# Altium PCB Capstone PCB.PcbDoc
Units mil, origin at the board's own origin, x right, y up, seen from the top; angles counter-clockwise.
Board outline 2600 x 4000 mil, 4 copper layers (Top Signal, Ground, Power, Bottom Signal), stack 62.45 mil thick; 105 components, 95 nets, 299 pads, 0 vias.
Unrouted connection lines stored in the file: 140.
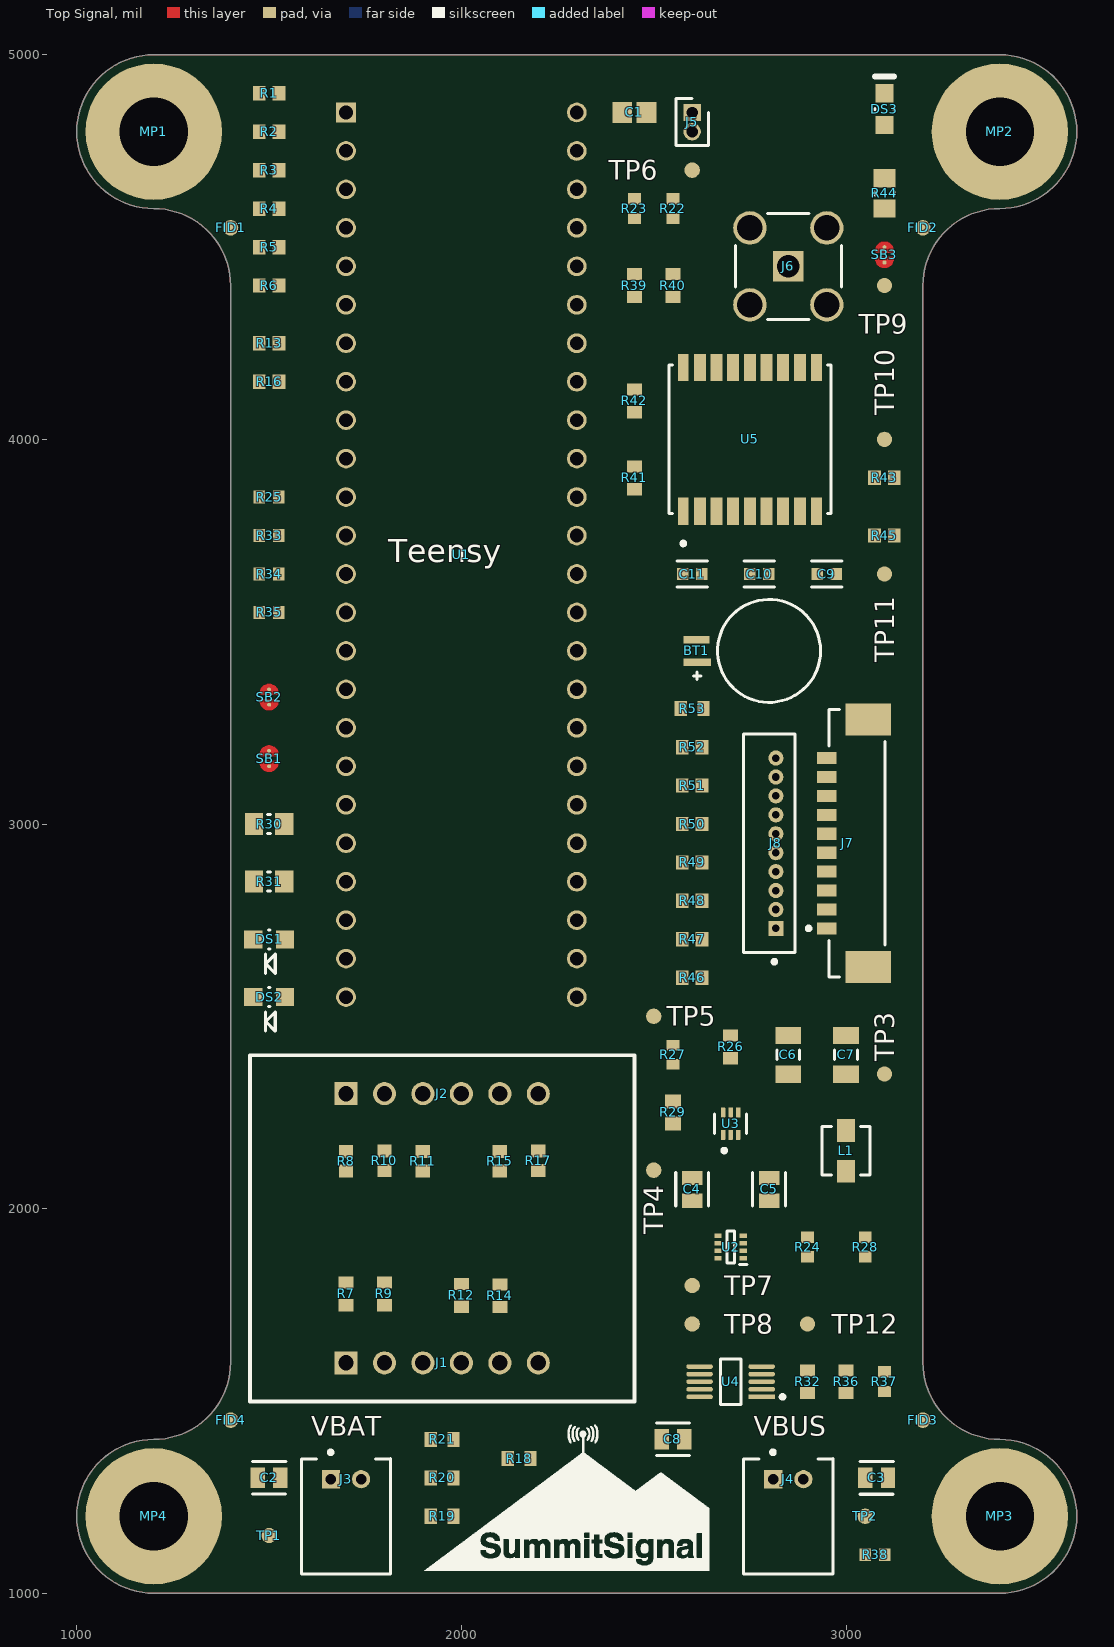
[diagram p0: Top Signal view]
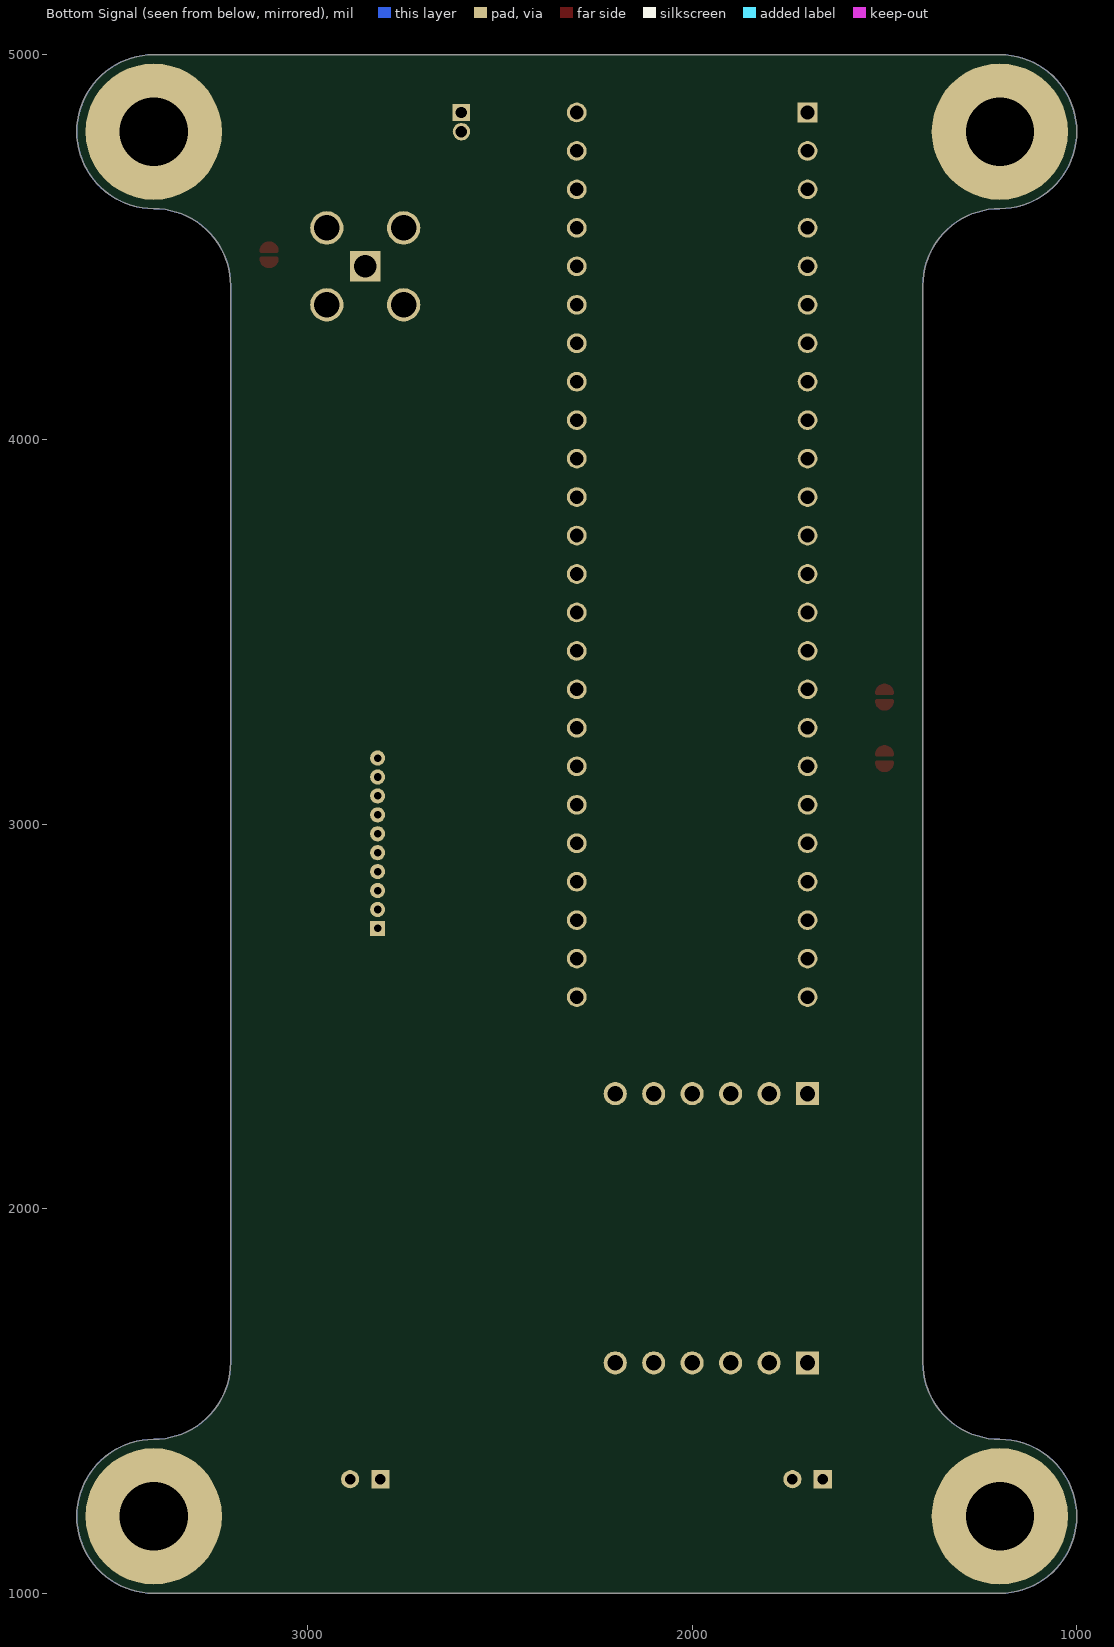
[diagram p1: Bottom Signal view, seen from below]
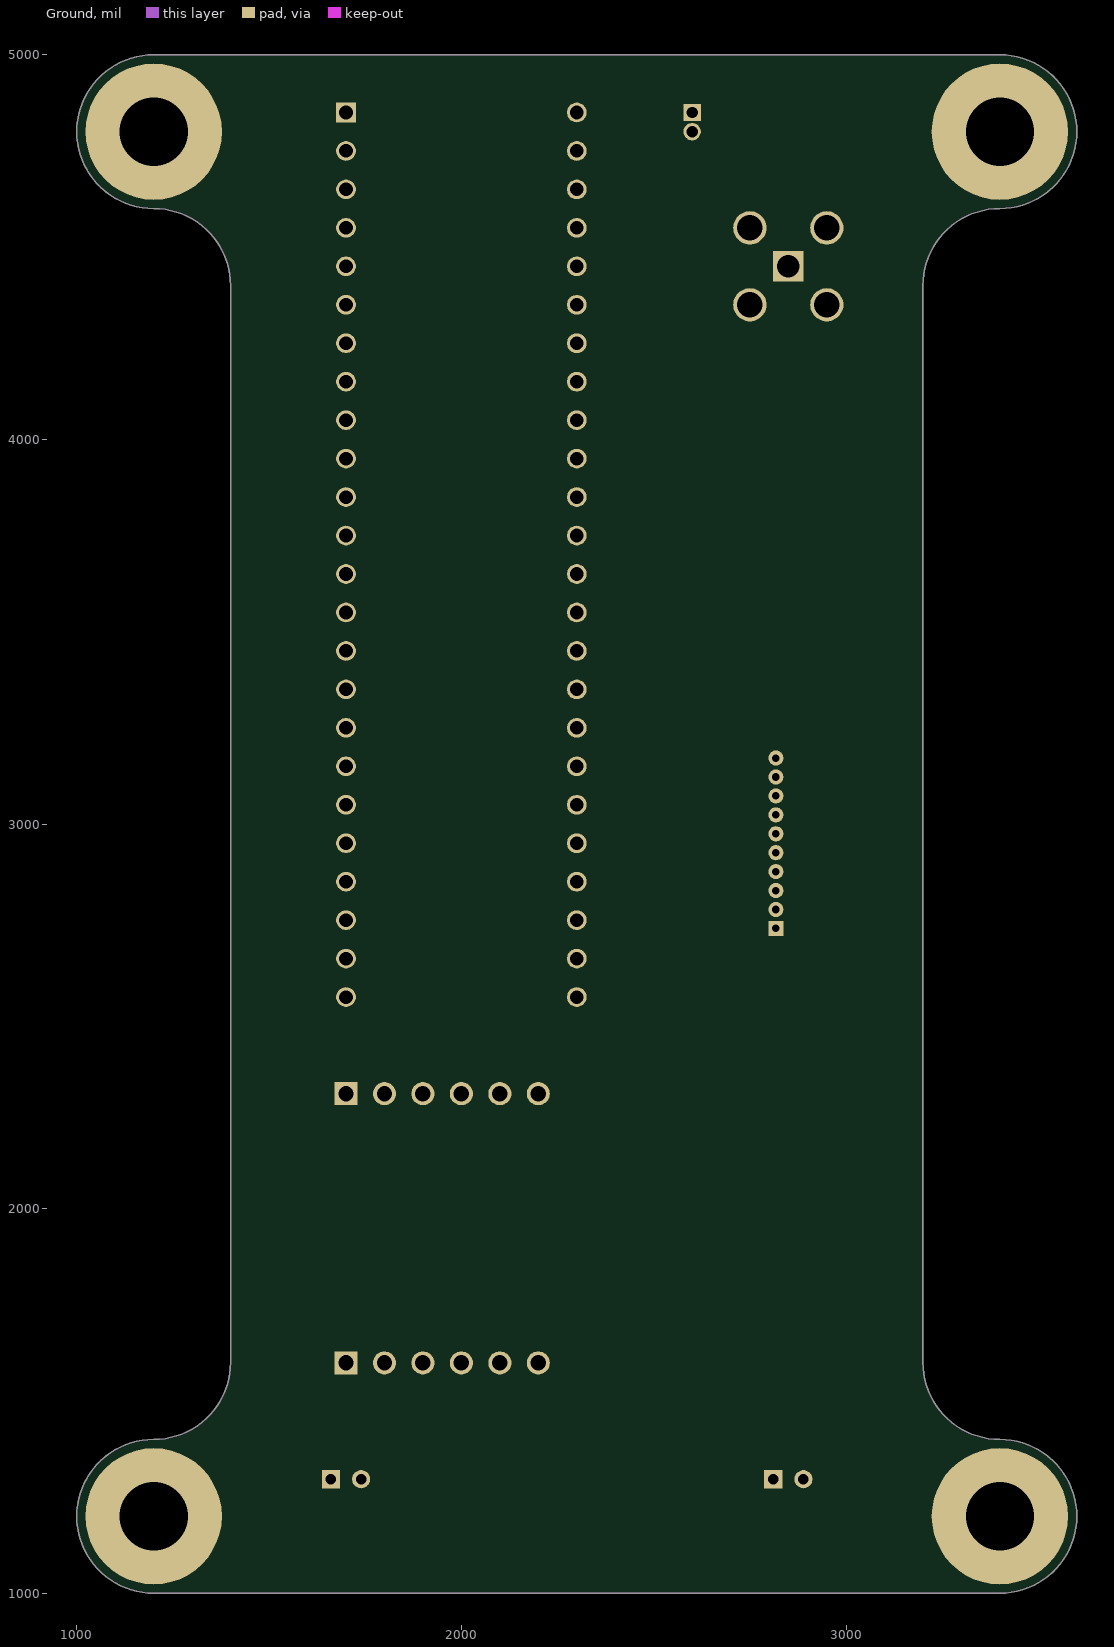
[diagram p2: Ground]
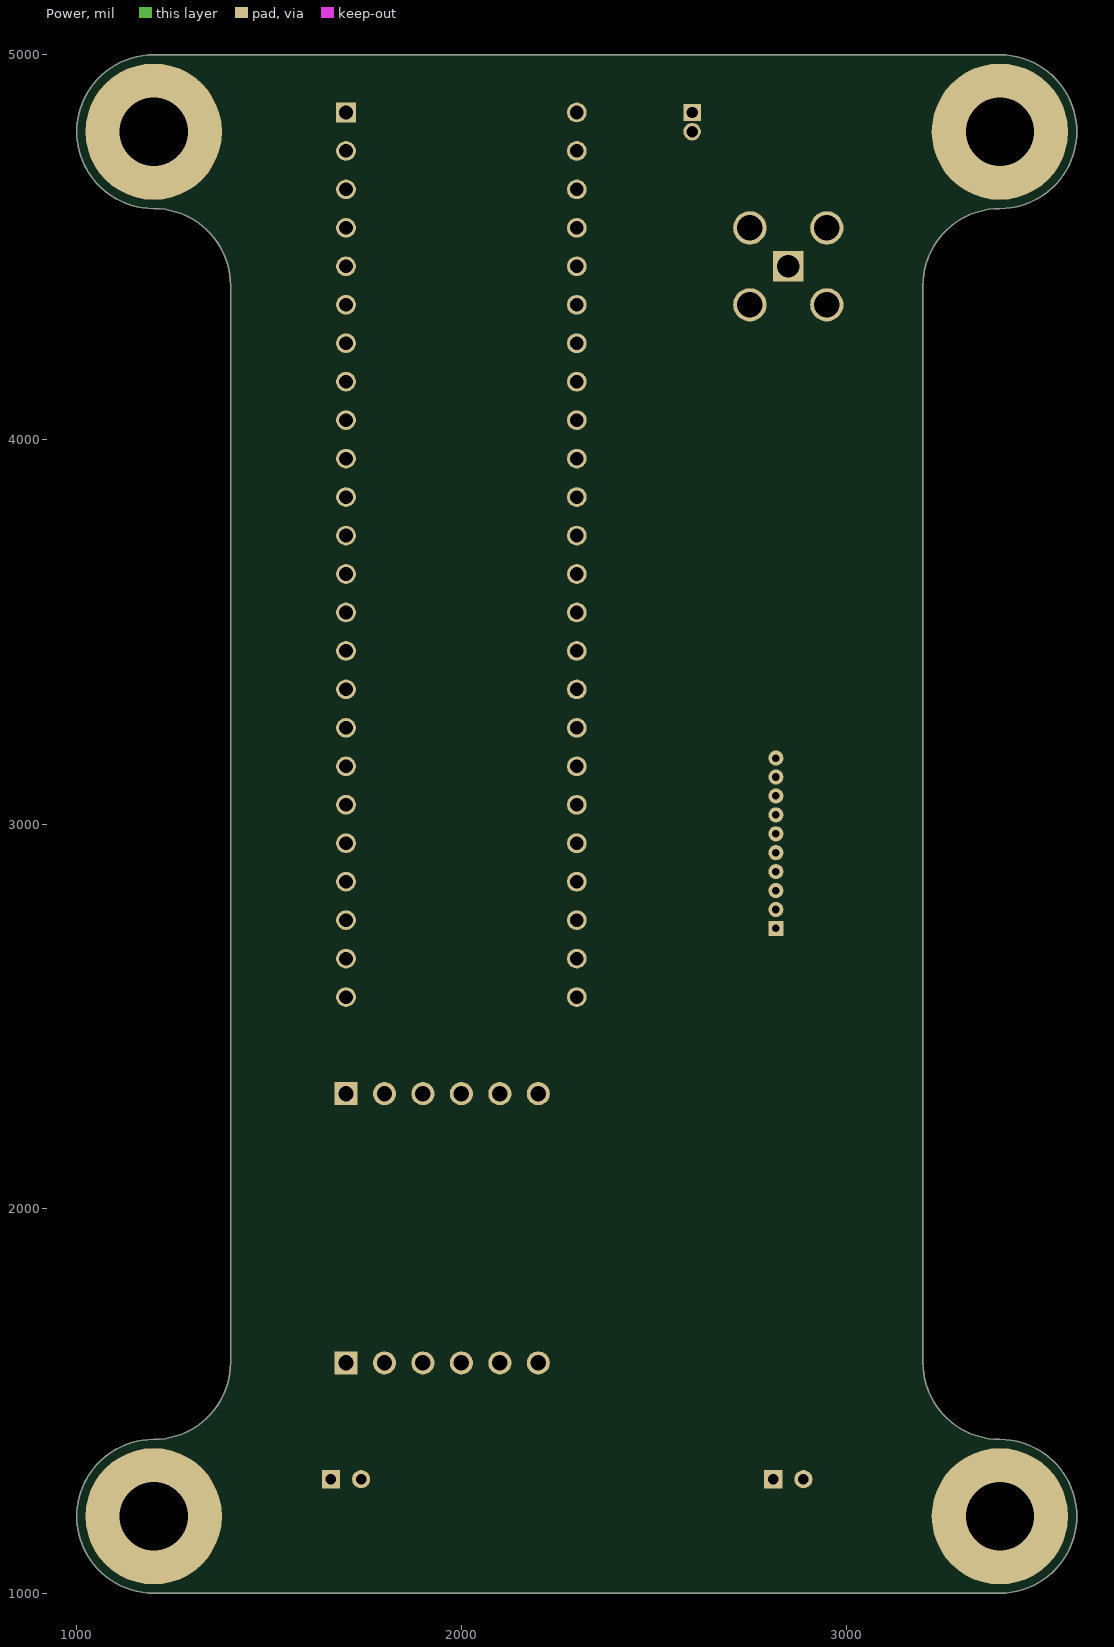
[diagram p3: Power]

## Layer stack, top to bottom
Top Solder: solder mask 1.2, Solder Resist, Dk 3.8
Top Signal: signal copper 1.38
Dielectric 2: prepreg 8.28, PP-006, Dk 4.4
Ground: signal copper 0.6
Dielectric 1: core 41.93, FR-4, Dk 4.6
Power: signal copper 0.6
Dielectric 3: prepreg 8.28, PP-006, Dk 4.4
Bottom Signal: signal copper 1.38
Bottom Solder: solder mask 1.2, Solder Resist, Dk 3.8

## Board outline
1200,1000 cw(c1200,1200) 1000,1200 cw(c1200,1200) 1200,1400 ccw(c1200,1600) 1400,1600 1400,4400 ccw(c1200,4400) 1200,4600 cw(c1200,4800) 1000,4800 cw(c1200,4800) 1200,5000 3400,5000 cw(c3400,4800) 3600,4800 cw(c3400,4800) 3400,4600 ccw(c3400,4400) 3200,4400 3200,1600 ccw(c3400,1600) 3400,1400 cw(c3400,1200) 3600,1200 cw(c3400,1200) 3400,1000

## Design rules (kind name [scope] priority, off if disabled: settings)
BoardOutlineClearance [All] p1: gap=10 ignorepadtopadclearanceinfootprint=FALSE except(0: Arc-SplitContinuation Track-SplitContinuation SMDPad-SplitContinuation THPad-SplitContinuation Via-SplitContinuation Fill-SplitContinuation Poly-SplitContinuation Region-SplitContinuation Text-SplitContinuation; 11.81: Arc-OutlineEdge Track-OutlineEdge SMDPad-OutlineEdge THPad-OutlineEdge Via-OutlineEdge Fill-OutlineEdge Poly-OutlineEdge Region-OutlineEdge Text-OutlineEdge)
Clearance [All] p1: gap=10 ignorepadtopadclearanceinfootprint=FALSE except(0: Arc-Hole Track-Hole SMDPad-Hole THPad-Hole Via-Hole Fill-Hole Poly-Hole Region-Hole Text-Hole; 3.54: Arc-Arc Arc-Track Track-Track; 5: SMDPad-SMDPad; 7.87: Arc-SMDPad Track-SMDPad)
HoleSize [All] p1: absolutevalues=TRUE maxlimit=100 minlimit=11.81 maxpercent=80.000 minpercent=20.000
MinimumAnnularRing [All] p1: minimumring=11.81
MinimumSolderMaskSliver [All] p1: minsoldermaskwidth=7.87
PolygonConnect [All] p1: connectstyle=Direct reliefconductorwidth=10 reliefentries=4 polygonreliefangle="90 Angle" airgapwidth=10
RoutingVias [All] p1: holewidth=11.81 width=35.43 viastyle="Through Hole" minholewidth=11.81 minwidth=35.43 maxholewidth=28 maxwidth=50
SolderMaskExpansion [All] p1: expansion=4 istentingtop=FALSE
Width GNSS [InNetClass('GNSS')] p1: maxlimit=13.48 minlimit=7.12 preferedwidth=13.48 toplayer_minwidth=13.48 midlayer1_maxwidth=7.12 midlayer1_prefwidth=7.12 midlayer2_maxwidth=7.12 midlayer2_prefwidth=7.12 bottomlayer_minwidth=13.48 impedanceprofiledriven=TRUE impedanceprofileid={8B519938-629A-44D7-94C1-89ACB021334B} impedanceprofilevalue=50.000000 minimp=50.000000 maximp=50.000000 favimp=50.000000
Width [All] p2: maxlimit=10 minlimit=3.54 preferedwidth=10
28 further rules are at their usual default settings.

## Classes and differential pairs
net class GNSS: RF_IN
component class "Teensy and ICs": C1 FID1 FID2 FID3 FID4 J1 J2 MP1 MP2 MP3 MP4 R1 R2 R3 R4 R5 R6 R7 R8 R9 R10 R11 R12 R13 R14 R15 R16 R17 R18 R19 R20 R21 U1
component class "Power Management": C2 C3 C4 C5 C6 C7 C8 DS1 DS2 J3 J4 J5 L1 R22 R23 R24 R25 R26 R27 R28 R29 R30 R31 R32 R33 R34 R35 R36 R37 R38 SB1 SB2 TP1 TP2 TP3 TP4 TP5 TP6 TP7 TP8 TP12 U2 U3 U4
component class Communication: BT1 C9 C10 C11 DS3 J6 J7 J8 R39 R40 R41 R42 R43 R44 R45 R46 R47 R48 R49 R50 R51 R52 R53 SB3 TP9 TP10 TP11 U5

## Components (designator, comment, footprint, x,y, rotation, side; value= is the part's Value field where it differs from the comment)
BT1 "MS621FE-FL11E" SEIK-MS621FE-FL11E-2_V 2800,3450 r180 top
C1 "GCM21BR71C155KA37L" "0805 Ceramic Capacitor" 2450,4850 r180 top
C2 "C0805C106K8PACTU" FP-C0805C-DG-MFG 1500,1300 r180 top value=10uF
C3 "C0805C106K8PACTU" FP-C0805C-DG-MFG 3079.53,1300 r0 top value=10uF
C4 "C0805C106K8PACTU" FP-C0805C-DG-MFG 2600,2050 r270 top value=10uF
C5 "C0805C106K8PACTU" FP-C0805C-DG-MFG 2800,2050 r270 top value=10uF
C6 "GRM31CR71C106KAC7L" CAPC3216X180X55LL20T25 2850,2400 r270 top
C7 "GRM31CR71C106KAC7L" CAPC3216X180X55LL20T25 3000,2400 r270 top
C8 "C0805C106K8PACTU" FP-C0805C-DG-MFG 2550,1400 r180 top value=10uF
C9 "CL10B105KP8NNNC" FP-CL10-IPC_C 2950,3650 r0 top
C10 "CL10B104MB8NNNC" FP-CL10-IPC_C 2774.68,3650 r180 top
C11 "CL10B105KP8NNNC" FP-CL10-IPC_C 2600,3650 r0 top
DS1 "SML-LXT0805GW-TR" LUMX-SML-LXT0805_V 1500,2700 r180 top
DS2 "SML-LXT0805GW-TR" LUMX-SML-LXT0805_V 1500,2550 r180 top
DS3 "LTST-C170KRKT" LTST-C170KRKT_V 3100,4858.66 r90 top
FID1 "Fiducial" "40 mil Circular Test Point" 1400,4550 r90 top
FID2 "Fiducial" "40 mil Circular Test Point" 3200,4550 r90 top
FID3 "Fiducial" "40 mil Circular Test Point" 3200,1450 r90 top
FID4 "Fiducial" "40 mil Circular Test Point" 1400,1450 r90 top
J1 "0022284067" 0022284067-Footprint-1 2200,1598.82 r90 top
J2 "0022284067" 0022284067-Footprint-1 2200,2298.82 r90 top
J3 "S2B-PH-K-S(LF)(SN)" JST-S2B-PH-K-S_V 1700,1200 r0 top
J4 "S2B-PH-K-S(LF)(SN)" JST-S2B-PH-K-S_V 2850,1200 r0 top
J5 "GRPB021VWVN-RC" HDRV2W40P0X127_1X2_254X214X400P 2600,4850 r270 top
J6 "901-143-6RFX" AMPH-901-143-6RFX_V 2850,4450 r90 top
J7 "53398-1071" MOLX-53398-1071_V 3018.9,2950 r270 top
J8 "53047-1010" FP-53047-1010-MFG 2800,2950 r270 top
L1 "IHLP1212AEERR47M11" FP-IHLP-1212AE-11-MFG 3000,2150 r90 top
MP1 "M4 Screw Hole" "New footprint 1" 1200,4800 r0 top
MP2 "M4 Screw Hole" "New footprint 1" 3400,4800 r0 top
MP3 "M4 Screw Hole" "New footprint 1" 3400,1200 r0 top
MP4 "M4 Screw Hole" "New footprint 1" 1200,1200 r0 top
R1 "ERJ-3GEYJ472V" "0603 Resistor" 1500,4900 r0 top
R2 "ERJ-3GEYJ472V" "0603 Resistor" 1500,4800 r0 top
R3 "ERJ-3GEYJ472V" "0603 Resistor" 1500,4700 r0 top
R4 "ERJ-3GEYJ472V" "0603 Resistor" 1500,4600 r0 top
R5 "ERJ-3GEYJ472V" "0603 Resistor" 1500,4500 r0 top
R6 "ERJ-3GEYJ472V" "0603 Resistor" 1500,4400 r0 top
R7 "RC0603JR-070RL" RESC1608X55X25ML10T15 1700,1778.35 r270 top
R8 "CRGCQ0603J33R" "0603 Resistor" 1700,2123.23 r270 top
R9 "RC0603JR-070RL" RESC1608X55X25ML10T15 1800,1778.35 r270 top
R10 "CRGCQ0603J33R" "0603 Resistor" 1800,2124.41 r90 top
R11 "CRGCQ0603J33R" "0603 Resistor" 1900,2123.23 r90 top
R12 "RC0603JR-070RL" RESC1608X55X25ML10T15 2000,1774.41 r90 top
R13 "CRGCQ0603J33R" "0603 Resistor" 1500,4250 r180 top
R14 "RC0603JR-070RL" RESC1608X55X25ML10T15 2100,1773.23 r90 top
R15 "CRGCQ0603J33R" "0603 Resistor" 2100,2123.23 r270 top
R16 "CRGCQ0603J33R" "0603 Resistor" 1500,4150 r180 top
R17 "CRGCQ0603J33R" "0603 Resistor" 2200,2124.41 r270 top
R18 "RC0603JR-070RL" RESC1608X55X25ML10T15 2150,1350 r0 top
R19 "RC0603JR-070RL" RESC1608X55X25ML10T15 1950,1200 r0 top
R20 "RC0603JR-070RL" RESC1608X55X25ML10T15 1950,1300 r0 top
R21 "RC0603JR-070RL" RESC1608X55X25ML10T15 1950,1400 r0 top
R22 "ERJ3EKF1002V" RESC1609X55X30LL15T15 2550,4600 r90 top
R23 "ERJ3EKF1002V" RESC1609X55X30LL15T15 2450,4600 r90 top
R24 "ERJ3EKF1002V" RESC1609X55X30LL15T15 2900,1900 r270 top
R25 "ERJ3EKF1002V" RESC1609X55X30LL15T15 1500,3850 r0 top
R26 "RC0603JR-070RL" RESC1608X55X25ML10T15 2700,2420.47 r270 top
R27 "ERJ-3EKF5232V" RESC1608X55X30LL15T15 2550,2400 r90 top value=732k
R28 "ERJ3EKF1002V" RESC1609X55X30LL15T15 3050,1900 r270 top
R29 "ERJ-3EKF1003V" RESC1608X55X30ML15T15 2550,2250 r90 top value=100k
R30 "RC0805JR-07200RL" RESC2013X60X35ML10T20 1500,3000 r180 top value=200
R31 "RC0805JR-07200RL" RESC2013X60X35ML10T20 1500,2850 r180 top value=200
R32 "RC0603JR-070RL" RESC1608X55X25ML10T15 2900,1550 r90 top
R33 "ERJ3EKF1002V" RESC1609X55X30LL15T15 1500,3750 r180 top
R34 "ERJ3EKF1002V" RESC1609X55X30LL15T15 1500,3650 r180 top
R35 "ERJ3EKF1002V" RESC1609X55X30LL15T15 1500,3550 r180 top
R36 "RC0603JR-070RL" RESC1608X55X25ML10T15 3000,1550 r90 top
R37 "ERJ3EKF1002V" RESC1609X55X30LL15T15 3100,1550 r270 top
R38 "ERJ3EKF1002V" RESC1609X55X30LL15T15 3075.59,1100 r180 top
R39 "RC0603JR-070RL" RESC1608X55X25ML10T15 2450,4400 r270 top
R40 "RC0603JR-070RL" RESC1608X55X25ML10T15 2550,4400 r270 top
R41 "RC0603JR-070RL" RESC1608X55X25ML10T15 2450,3900 r90 top
R42 "RC0603JR-070RL" RESC1608X55X25ML10T15 2450,4100 r90 top
R43 "CRGCQ0603J33R" "0603 Resistor" 3100,3900 r180 top
R44 "RC0805FR-07374RL" RESC2013X60X35ML10T20 3100,4639.37 r90 top value=374
R45 "CRGCQ0603J33R" "0603 Resistor" 3100,3750 r180 top
R46 "CRGCQ0603J33R" "0603 Resistor" 2600,2600 r180 top
R47 "CRGCQ0603J33R" "0603 Resistor" 2600,2700 r180 top
R48 "CRGCQ0603J33R" "0603 Resistor" 2600,2800 r180 top
R49 "CRGCQ0603J33R" "0603 Resistor" 2600,2900 r180 top
R50 "CRGCQ0603J33R" "0603 Resistor" 2600,3000 r180 top
R51 "CRGCQ0603J33R" "0603 Resistor" 2600,3100 r180 top
R52 "CRGCQ0603J33R" "0603 Resistor" 2600,3200 r0 top
R53 "RC0603JR-070RL" RESC1608X55X25ML10T15 2600,3300 r0 top
SB1 "SolderBridgeOpen" SOLDERBRIDGEOPEN 1500,3170 r90 top
SB2 "SolderBridgeOpen" SOLDERBRIDGEOPEN 1500,3330 r90 top
SB3 "SolderBridgeOpen" SOLDERBRIDGEOPEN 3100,4480 r90 top
TP1 "0.040\" Circular Test Point" "40 mil Circular Test Point" 1500,1150 r90 top
TP2 "0.040\" Circular Test Point" "40 mil Circular Test Point" 3050,1200 r90 top
TP3 "0.040\" Circular Test Point" "40 mil Circular Test Point" 3100,2350 r90 top
TP4 "0.040\" Circular Test Point" "40 mil Circular Test Point" 2500,2100 r90 top
TP5 "0.040\" Circular Test Point" "40 mil Circular Test Point" 2500,2500 r90 top
TP6 "0.040\" Circular Test Point" "40 mil Circular Test Point" 2600,4700 r90 top
TP7 "0.040\" Circular Test Point" "40 mil Circular Test Point" 2600,1800 r90 top
TP8 "0.040\" Circular Test Point" "40 mil Circular Test Point" 2600,1700 r90 top
TP9 "0.040\" Circular Test Point" "40 mil Circular Test Point" 3100,4400 r90 top
TP10 "0.040\" Circular Test Point" "40 mil Circular Test Point" 3100,4000 r90 top
TP11 "0.040\" Circular Test Point" "40 mil Circular Test Point" 3100,3650 r90 top
TP12 "0.040\" Circular Test Point" "40 mil Circular Test Point" 2900,1700 r90 top
U1 "Teensy 4.1" Teensy_4.1 2000,3700 r270 top
U2 "TPS2116DRLR" SOTFL50P160X60-8N 2700,1900 r180 top
U3 "TPS61023DRLT" FP-DRL0006A-MFG 2700,2220.87 r90 top
U4 "MCP73833T-AMI/UN" FP-C04-021-IPC_B 2700,1550 r180 top
U5 "MAX-M10S-00B" FP-MAX-M10S-00B-MFG 2750,4000 r90 top

## Footprints (in the part's own frame and the unit in brackets; to place one, negate y for a bottom-side part, rotate by r counter-clockwise, add the part's x,y. Pads: shape width x height; smd on the part's side, far side on the other; paste and mask are expansions set on the pad)
"40 mil Circular Test Point" [mil]
  round 40 smd: 1(0,0)
"0603 Resistor" [mm] "0603 Resistor"
  rect 0.85x0.95 smd: 1(-0.65,0) 2(0.65,0)
  body extent -0.8,-0.4 0.8,0.4, height 0.45
"0805 Ceramic Capacitor" [mm] "0805 Ceramic Capacitor"
  rect 1.3x1.4 smd: 1(-0.8,0) 2(0.8,0)
  body extent -1,-0.64 1,0.64, height 1.27
0022284067-Footprint-1 [mil]
  rect 60x60 hole 40 mask+0: 1(0,500)
  round 60 hole 40 mask+0: 2(0,400) 3(0,300) 4(0,200) 5(0,100) 6(0,0)
AMPH-901-143-6RFX_V [mm] "THD, 5-Leads, Body 7x7mm, Pitch 2.54mm"
  rect 2x2 hole 1.5: 1(0,0)
  round 2.2 hole 1.7: 2(-2.54,2.54) 3(-2.54,-2.54) 4(2.54,-2.54) 5(2.54,2.54)
  silkscreen extent -3.5,-3.5 3.5,3.5, body extent -3.5,-3.5 11.6,3.5, height 9.85
CAPC3216X180X55LL20T25 [mm] "Chip Capacitor, 2-Leads, Body 3.4x1.8mm, IPC High Density"
  rect 1.15x1.7 smd: 1(-1.275,0) 2(1.275,0)
  silkscreen extent -0.3,-0.75 0.3,0.75, body extent -1.7,-0.9 1.7,0.9, height 1.8
FP-53047-1010-MFG [mm]
  rect 1x1 hole 0.5 paste-1000 mask+0: 1(5.625,0.45)
  round 1 hole 0.5 paste-1000 mask+0: 2(4.375,0.45) 3(3.125,0.45) 4(1.875,0.45) 5(0.625,0.45) 6(-0.625,0.45) 7(-1.875,0.45) 8(-3.125,0.45) 9(-4.375,0.45) 10(-5.625,0.45)
  silkscreen extent -7.22,-1.7 7.95,1.7, body extent -7.32,-1.8 7.32,1.8, height 0.25
FP-C04-021-IPC_B [mm]
  rect 1.754x0.303 smd paste+0 mask+0: 1(-2.05,1)
  rrect100% 1.754x0.303 smd paste+0 mask+0: 2(-2.05,0.5) 3(-2.05,0) 4(-2.05,-0.5) 5(-2.05,-1) 6(2.05,-1) 7(2.05,-0.5) 8(2.05,0) 9(2.05,0.5) 10(2.05,1)
  silkscreen extent -3.55,-1.5 0.67,1.5
FP-C0805C-DG-MFG [mm]
  rect 0.95x1.35 smd paste+0 mask+0: 1(-0.75,0) 2(0.75,0)
  silkscreen extent -1.11,-1.08 1.1,1.07, body extent -1.4,-0.85 1.4,0.85, height 0.25
FP-CL10-IPC_C [mil]
  rect 29.85x31.97 smd paste+0 mask+0: 1(-24.68,0) 2(24.68,0)
  silkscreen extent -40,-33 40,33, body extent -44,-22 44,22, height 10
FP-DRL0006A-MFG [mm]
  rrect33% 0.67x0.3 smd paste+0 mask+0: 1(-0.74,0.5) 2(-0.74,0) 3(-0.74,-0.5) 4(0.74,-0.5) 5(0.74,0) 6(0.74,0.5)
  silkscreen extent -1.9,-1.05 0.65,1.05, body extent -1.17,-1.1 1.17,1.1, height 0.25
FP-IHLP-1212AE-11-MFG [mm]
  rect 1.5x1.2 smd paste+0 mask+0: 1(-1.35,0) 2(1.35,0)
  silkscreen extent -1.6,-1.6 1.6,1.6, body extent -2.2,-1.7 2.2,1.7, height 0.25
FP-MAX-M10S-00B-MFG [mm]
  rect 1.8x0.7 smd paste-1000 mask+0: 1(-4.75,4.4) 9(-4.75,-4.4) 10(4.75,-4.4) 18(4.75,4.4)
  rect 1.8x0.8 smd paste-1000 mask+0: 2(-4.75,3.3) 3(-4.75,2.2) 4(-4.75,1.1) 5(-4.75,0) 6(-4.75,-1.1) 7(-4.75,-2.2) 8(-4.75,-3.3) 11(4.75,-3.3) 12(4.75,-2.2) 13(4.75,-1.1) 14(4.75,0) 15(4.75,1.1) 16(4.75,2.2) 17(4.75,3.3)
  silkscreen extent -7,-5.35 4.9,5.35, body extent -5.75,-5.45 5.75,5.45, height 0.25
HDRV2W40P0X127_1X2_254X214X400P [mm]
  rect 1.15x1.15 hole 0.75: 1(0,0)
  round 1.15 hole 0.75: 2(1.27,0)
  silkscreen extent -0.92,-1.07 2.19,1.07, body extent -0.64,-1.07 1.91,1.07, height 4
JST-S2B-PH-K-S_V [mm] "THD, 2-Leads, Body 7.6x5.9mm, Pitch 2mm"
  rect 1.2x1.2 hole 0.7: 1(-1,2.45)
  round 1.2 hole 0.7: 2(1,2.45)
  silkscreen extent -2.95,-3.8 2.95,4.35, body extent -2.95,-3.8 2.95,3.8, height 4.8
LTST-C170KRKT_V [mm] "SMD, 2-Leads, Body 2x1.25mm"
  rect 1.2x1.2 smd: 1(-1.05,0) 2(1.05,0)
  silkscreen extent -0.05,-0.63 2.16,0.64, body extent -1,-0.63 1,0.63, height 1.2
LUMX-SML-LXT0805_V [mm] "SMD, 2-Leads, Body 2x1.25mm"
  rect 1.2x1.2 smd: 1(-1.05,0) 2(1.05,0)
  silkscreen extent -0.41,-0.63 0.23,2.25, body extent -1,-0.63 1,0.63, height 0.8
MOLX-53398-1071_V [mm] "SMD, 10-Leads, Body 17.65x3.7mm, Pitch 1.25mm"
  rect 0.8x1.3 smd: 1(5.625,-1.75) 2(4.375,-1.75) 3(3.125,-1.75) 4(1.875,-1.75) 5(0.625,-1.75) 6(-0.625,-1.75) 7(-1.875,-1.75) 8(-3.125,-1.75) 9(-4.375,-1.75) 10(-5.625,-1.75)
  rect 2.1x3 smd: MP1(8.175,1) MP2(-8.175,1)
  silkscreen extent -8.82,-3.07 8.82,2.1, body extent -8.82,-2.1 8.83,2.1, height 4.77
"New footprint 1" [mm]
  round 9 hole 4.5: 1(0,0)
RESC1608X55X25ML10T15 [mm] "Chip Resistor, 2-Leads, Body 1.60x0.80mm, IPC Low Density"
  rect 0.8x1 smd: 1(-0.75,0) 2(0.75,0)
  body extent -0.85,-0.45 0.85,0.45, height 0.55
RESC1608X55X30LL15T15 [mm] "Chip Resistor, 2-Leads, Body 1.60x0.80mm, IPC High Density"
  rect 0.7x0.85 smd: 1(-0.625,0) 2(0.625,0)
  body extent -0.87,-0.48 0.87,0.48, height 0.55
RESC1608X55X30ML15T15 [mm] "Chip Resistor, 2-Leads, Body 1.60x0.80mm, IPC Low Density"
  rect 0.9x1.05 smd: 1(-0.725,0) 2(0.725,0)
  body extent -0.87,-0.48 0.87,0.48, height 0.55
RESC1609X55X30LL15T15 [mm] "Chip Resistor, 2-Leads, Body 1.75x0.95mm, IPC High Density"
  rect 0.75x0.85 smd: 1(-0.65,0) 2(0.65,0)
  body extent -0.87,-0.48 0.87,0.48, height 0.55
RESC2013X60X35ML10T20 [mm] "Chip Resistor, 2-Leads, Body 2.00x1.25mm, IPC Low Density"
  rect 1.2x1.45 smd: 1(-1,0) 2(1,0)
  silkscreen extent -0.1,-0.63 0.1,0.63, body extent -1.05,-0.67 1.05,0.67, height 0.6
SEIK-MS621FE-FL11E-2_V [mm] "SMD, 2-Leads, Diameter 6.8mm"
  rect 1.8x0.5 smd: 1(4.75,0.75)
  rect 1.7x0.5 smd: 2(4.8,-0.75)
  silkscreen extent -3.4,-3.4 5,3.4, body extent -3.4,-3.4 4.35,3.4, height 2.7
SOLDERBRIDGEOPEN [mil]
  round 10 smd mask+0: 1(20,0) 2(-20,0)
  Top Signal region: -10,20 -20,20 -30,10 -30,-10 -20,-20 -10,-20
  Top Signal region: 10,20 20,20 30,10 30,-10 20,-20 10,-20
  Top Signal lines w10: -10,20 ccw(c-10,0) -10,-20 -10,20 ; 10,20 cw(c10,0) 10,-20 10,20
SOTFL50P160X60-8N [mm]
  rect 0.475x0.3 smd: 1(-0.838,0.75) 2(-0.838,0.25) 3(-0.838,-0.25) 4(-0.838,-0.75) 5(0.838,-0.75) 6(0.838,-0.25) 7(0.838,0.25) 8(0.838,0.75)
  silkscreen extent -1.07,-1.05 0.25,1.15, body extent -0.8,-1.05 0.8,1.05, height 0.6
Teensy_4.1 [mm] "Teensy 4.1 With Headers"
  rect 1.3x1.3 hole 0.9: 1(-29.21,-7.62)
  round 1.3 hole 0.9: 2(-26.67,-7.62) 3(-24.13,-7.62) 4(-21.59,-7.62) 5(-19.05,-7.62) 6(-16.51,-7.62) 7(-13.97,-7.62) 8(-11.43,-7.62) 9(-8.89,-7.62) 10(-6.35,-7.62) 11(-3.81,-7.62) 12(-1.27,-7.62) 13(1.27,-7.62) 14(3.81,-7.62) 15(6.35,-7.62) 16(8.89,-7.62) 17(11.43,-7.62) 18(13.97,-7.62) 19(16.51,-7.62) 20(19.05,-7.62) 21(21.59,-7.62) 22(24.13,-7.62) 23(26.67,-7.62) 24(29.21,-7.62) 25(29.21,7.62) 26(26.67,7.62) 27(24.13,7.62) 28(21.59,7.62) 29(19.05,7.62) 30(16.51,7.62) 31(13.97,7.62) 32(11.43,7.62) 33(8.89,7.62) 34(6.35,7.62) 35(3.81,7.62) 36(1.27,7.62) 37(-1.27,7.62) 38(-3.81,7.62) 39(-6.35,7.62) 40(-8.89,7.62) 41(-11.43,7.62) 42(-13.97,7.62) 43(-16.51,7.62) 44(-19.05,7.62) 45(-21.59,7.62) 46(-24.13,7.62) 47(-26.67,7.62) 48(-29.21,7.62)
  body extent -31.73,-8.89 30.48,8.89, height 7.37

## Part data
BT1: library part CMP-2000-05342-1, "MS Lihium Rechargeable Battery, 3 V, -20 to 60 degC, Tray", Capacity=5.5mAh, Manufacturer=SeikoInstruments, Output Voltage=3V, Battery Size=621, Brand=SeikoInstrumentsMicroEnergy, Chemistry=Lithium, Datasheet URL=http://datasheet.octopart.com/MS621FE-FL11E-Seiko-datasheet-5320152.pdf, Datasheet Version=Jan-08, Diameter=6.8mm, Factory Pack Quantity=100, Height=2.1mm, Manufacturer URL=http://www.sii.co.jp/en/, Mounting Style=WithLeads, Orientation=Vertical, Packaging=Tray, Product Category=CoinCellBattery, Rechargeable/Non-Rechargeable=Rechargeable, RoHS=NotApplicable, Series=MS, Termination Style=ThroughHole, Type=CoinCellBatterywithLeads, Unit Weight=0.008113oz
C1: library part CMP-001-0067-2, "0805 Ceramic Capacitor, 1.5uF, 16V, X7R", Capacitance=1.5uF, Package=0805, Tolerance=10%, Voltage Rating=16V
C2 C3 C4 C5 C8: library part CMP-2007-03243-2, "CAP CER 10UF 10V X5R 0805", 3DS Part Number=220-00001, Capacitance=10uF, Manufacturer=Kemet, Package=C0805C-DG, Temperature="-55°C to +85°C", Temperature Characteristic=X5R, Temperature Coefficient=15%, Temperature Range High=+85°C, Temperature Range Low=-55°C, Tolerance=10%, Voltage=10V, Automotive=No, Category=Cap, ComponentLink2Description=Datasheet, ComponentLink2URL=https://content.kemet.com/datasheets/KEM_C1006_X5R_SMD.pdf, Device Class L1="Passive Components", Device Class L2=Capacitors, Device Class L3="Ceramic Capacitors", Digikey Description="CAP CER 10UF 10V X5R 0805", Height=1.4mm, Ipc Land Pattern Name=CAPC200125X125, Lead Free=Yes, Manufacturer Part Number=C0805C106K8PACTU, Material=Ceramic, Mouser Description="CAP CER 10UF 10V X5R 0805", Octopart=https://octopart.com/c0805c106k8pactu-kemet-98697, RoHS=TRUE, Voltage Rating=10V
C6 C7: library part CMP-2000-06352-1, "Chip Capacitor, 10 uF, +/- 10%, 16 V, -55 to 125 degC, 1206 (3216 Metric), RoHS, Tape and Reel", Capacitance=10µF, Manufacturer=Murata, Operating Temperature=-55°C~125°C, Package / Case=1206(3216Metric), Package Description="2-Pin Surface Mount Device, Body 3.2 x 1.6 mm", Package Reference=1206, Ratings=-, Standard Package=1, Temperature Coefficient=X7R, Tolerance=±10%, Voltage - Rated=16V, Applications=GeneralPurpose, Catalog Drawings=GRMSeries_1206_1.6, Category=Capacitors, Datasheet URL=http://search.murata.co.jp/Ceramy/image/img/A01X/G101/ENG/GRM31CR71C106KAC7-01.pdf, Datasheet Version=03/2016, Family=CeramicCapacitors, Featured Product=GA3SafetyRecognizedCapsandHi-CapMLCC, Features=-, Height - Seated (Max)=-, Lead Spacing=-, Lead Style=-, Manufacturer URL=http://www.murata.com/, Mounting Technology=SurfaceMount, Mounting Type=SurfaceMount,MLCC, Online Catalog=GRMSeries, Other Names=490-3911-6, Packaging=Digi-Reel®, Product Training Modules=High-CapMultilayerCeramicCapacitors, Series=GRM, Size / Dimension="0.126\"Lx0.063\"W(3.20mmx1.60mm)", Thickness (Max)="0.071\"(1.80mm)"
C9 C11: library part CMP-2000-06094-2, "Cap Ceramic 1uF 10V X7R ±10% Pad SMD 0603 +125°C T/R", Capacitance=1uF, Case Code (Imperial)=0603, Case Code (Metric)=1608, Dielectric=X7R, Max Operating Temperature=125°C, Min Operating Temperature=-55°C, Package Quantity=1, Tolerance=10%, Voltage Rating=10V, Case/Package=0603, Contact Plating=Tin, Depth=0.8mm, Height=0.8mm, Lead Free="Lead Free", Length=1.6mm, Mount="Surface Mount", Packaging="Tape and Reel", Radiation Hardening=No, Thickness=0.035inch, Voltage Rating (DC)=10V, Width=0.031inch
C10: library part CMP-13271-001724-1, "Cap Ceramic 100nF 50V X7R ±20% Pad SMD 0603 +125°C T/R", Capacitance=100nF, Case Code (Imperial)=0603, Case Code (Metric)=1608, Dielectric=X7R, Max Operating Temperature=125°C, Min Operating Temperature=-55°C, Package Quantity=1, Tolerance=20%, Voltage Rating=50V, Case/Package=0603, Depth=0.8mm, Height=0.8mm, Lead Free="Lead Free", Length=1.6mm, Mount="Surface Mount", Packaging="Tape and Reel", Radiation Hardening=No, Thickness=0.035inch, Voltage Rating (DC)=50V, Width=0.031inch
DS1 DS2: library part CMP-1724-00001-1, "LED, GREEN, 565 nm, 2 V, -25 to 80 degC, 2-Pin SMD, RoHS, Tape and Reel", Case Code (Imperial)=0805, Case Code (Metric)=2012, Color=Green, Max Operating Temperature="85 degC", Min Operating Temperature="-25 degC", Package Quantity=4000, Case\/Package=0805, ComponentLink1Description="Manufacturer URL", ComponentLink1URL=http://www.lumexinstruments.com/, ComponentLink2Description=Datasheet, ComponentLink2URL=http://www.lumex.com/content/files/ProductAttachment/SML-LXT0805GW-TR.pdf, DatasheetVersion="Rev. F, 09/2009", Length="2 mm", Mount="Surface Mount", Mounting Technology="Surface Mount", PackageDescription="2-Pin Surface Mount Device, Body 2 x 1.25 mm", PackageReference=SML-LXT0805, Packaging="Tape and Reel", REACH SVHC="No SVHC", RoHSCompliant=true, Width="1.25 mm"
DS3: library part CMP-2000-07593-1, "LED Red, 75 mW, 54 mcd, -55 to 85 degC, 2-Pin SMD, RoHS, Tape and Reel", Case Code (Imperial)=0805, Case Code (Metric)=2012, Colour=Red, Forward Current=30mA, Forward Voltage=2V, Lens Colour=Colorless, Manufacturer=Lite-On, Max Operating Temperature=85degC, Min Operating Temperature=-55degC, Package Description="2-Pin Surface Mount Device, Body 2 x 1.25 mm", Package Quantity=1, Package Reference=C170KRKT, Power Dissipation=75mW, Test Current=20mA, Case\/Package=0805, Datasheet URL=http://optoelectronics.liteon.com/upload/download/DS-22-99-0150/LTST-C170KRKT.pdf, Datasheet Version="Rev. D, 11/2014", Depth=1.6mm, Dominant Wavelength=631nm, Height=1.1mm, Illumination Colour=Red, Lead Free=LeadFree, Length=3.2mm, Lens Style=Rectangular, Lens Transparency=Clear, Luminous Intensity=54mcd, Manufacturer URL=http://www.us.liteon.com/, Mount=SurfaceMount, Mounting Technology=SurfaceMount, Number of Elements=1, Number of LEDs=1, Number of Pins=2, Packaging=TapeandReel, Power Rating=75mW, Radiation Hardening=No, RoHSCompliant=True, Viewing Angle=130degrees, Wavelength=639nm, Width=1.25mm
FID1 FID2 FID3 FID4: library part CMP-00019-1
J1 J2: library part CMP-002-00107-3, "Board Connector, 6 Contact(s), 1 Row(s), Male, Straight, Solder Terminal", Current Rating=0A, Voltage Rating=0V, Gender=Pin, Mounting Type="Through Hole", Number of Contacts=6, Orientation=Vertical
J3 J4: library part CMP-1755-00004-1, "Male Header, Pitch 2 mm, 1 x 2 Position, Height 4.8 mm, Tail Length 3.4 mm, -25 to 85 degC, RoHS, Bulk", Capacitance="10 uF", Case\Package=Radial, Max Operating Temperature="85 degC", Min Operating Temperature="-40 degC", Package Quantity=200, Tolerance=20%, Voltage Rating="50 V", ComponentLink1Description=Datasheet, ComponentLink1URL=http://www.jst-mfg.com/product/pdf/eng/ePH.pdf, DatasheetVersion=Dec-12, Diameter="5 mm", Height="11 mm", Lead Pitch="2 mm", Length="11 mm", Mount="Through Hole", PackageDescription="Male Header, Pitch 2 mm, 1 x 2 Position, Height 4.8 mm, Tail Length 3.4 mm", PackageReference=S2B-PH-K-S, Packaging=Bulk, Pins=2, Radiation Hardening=No, REACH SVHC="No SVHC", RoHSCompliant=true, Voltage Rating (DC)="50 V"
J5: "Connector", Manufacturer_Name=Sullins, Datasheet Link=https://datasheet.datasheetarchive.com/originals/distributors/Datasheets-DGA21/2082060.pdf, Height=4mm, Manufacturer_Part_Number=GRPB021VWVN-RC
J6: library part CMP-00176-2, "connector, rf coaxial, sma rt angle pcb jack recept, 4 legs, blunt post term, gold", Current Rating=0A, Voltage Rating=0V, Gender=Pin, Mounting Type="Through Hole", Number of Contacts=5, Orientation="Right Angle"
J7: library part CMP-2000-05635-1, "Male Header, Pitch 1.25 mm, 1 x 10 Position, Height 4.7 mm, -40 to 85 degC, RoHS, Tape and Reel", Current Rating=1A, Manufacturer=Molex, Package Description="Male Header, Pitch 1.25 mm, 1 x 10 Position, Height 4.7 mm", Voltage Rating=125V, Brand=Molex, Contact Gender=Pin(Male), Contact Material=PhosphorBronze, Contact Plating=Tin, Datasheet URL=http://www.molex.com/pdm_docs/sd/533981071_sd.pdf, Datasheet Version="Rev. J, 09/2015", Factory Pack Quantity=1000, Housing Material=Nylon, Manufacturer URL=http://www.molex.com/, Mounting Angle=Vertical, Mounting Style=SMD, Mounting Technology=SurfaceMount, Number of Positions=10Position, Number of Rows=1Row, Package Reference=53398-1071, Packaging=Reel, Pitch=1.25mm, Product=Headers, Product Category=Headers&WireHousings, RoHS=Details, Series=53398, Termination Style=SMD, Tradename=PicoBlade, Type=Shrouded
J8: library part CMP-04776-000170-1, "CONN HEADER VERT 10POS 1.25MM", Color=Natural, Contact Resistance=20MR, Current=1A, Flammability Rating="UL94 V-0", Housing Color=White, Insulation Resistance=100MR, Max Operating Temperature=85°C, Max Voltage Rating (AC)=125V, Max Voltage Rating (DC)=125.125kV, Min Operating Temperature=-40°C, Package Quantity=2000, Body Plating=Tin, Contact Gender=Male, Contact Material=Bronze, Contact Plating=Tin, Current Rating=1A, Depth=3.2mm, Glow Wire Compliant=Non-compliant, Height=4.2mm, Housing Material=Nylon, Lead Free="Lead Free", Lead Pitch=1.25mm, Length=14.25mm, Max Current Rating=1A, Mount="Through Hole", Number of Circuits=10, Number of Contacts=10, Number of Poles=10, Number of Positions=10, Number of Rows=1, Orientation=Vertical, Packaging=Tray, Pitch=1.25mm, Plating=Tin, Radiation Hardening=No, RoHS Compliant=Yes, Series=PicoBlade, Termination=Solder, Voltage=125V, Voltage Rating=125V, Voltage Rating (AC)=125V, Voltage Rating (DC)=125V, Working Voltage=125V
L1: library part CMP-02424-000856-1, "FIXED IND 470NH 6.7A 15 MOHM SMD", Case Code (Imperial)=1212, Case/Package=Nonstandard, Current Rating=6.7A, DC Resistance (DCR)=15mR, Inductance=470nH, Inductance Tolerance=20%, Max Operating Temperature=125°C, Min Operating Temperature=-55°C, Package Quantity=3000, Self Resonant Frequency=1MHz, Test Frequency=100kHz, Core Material=Ferrite, Depth=3.2mm, Height=1.2mm, Height - Seated (Max)=0.059inch, Lead Free="Lead Free", Length=0.144inch, Max DC Current=6.7A, Military Standard=Not, Mount="Surface Mount", Number of Pins=2, Packaging="Cut Tape", Radiation Hardening=No, Rated Current-Max=6.7A, RMS Current (Irms)=6.7A, RoHS Compliant=Yes, Saturation Current=6.7A, Series=IHLP-1212AE-11, Shielding=Shielded, Termination=SMD/SMT, Tolerance=20%, Width=0.118inch
MP1 MP2 MP3 MP4: library part CMP-00024-1, "Plated hole for M4 mounting hardware"
R1 R2 R3 R4 R5 R6: library part CMP-001-0036-2, "0603 Resistor, 4.7kΩ, ±5%, 0.1W", Package=0603, Power Rating=100mW, Resistance=4.7kΩ, Tolerance=5%
R7 R9 R12 R14 R18 R19 R20 R21 R26 R32 R36 R39 R40 R41 R42 R53: library part CMP-2100-03667-1, "Chip Resistor, 0 Ohm, +/- 5%, 0.1 W, -55 to 155 degC, 0603 (1608 Metric), RoHS, Tape and Reel", Case Code (Imperial)=0603, Case Code (Metric)=1608, Manufacturer=Yageo, Max Operating Temperature=155degC, Min Operating Temperature=-55degC, Package Description="2-Pin Surface Mount Device, Body 1.6 x 0.8 mm", Package Quantity=5000, Power Rating=100mW, Resistance=0, Temperature Coefficient=200ppm/degreesC, Tolerance=5%, Voltage Rating=50V, Case/Package=0603, Composition=ThickFilm, Contact Plating=Tin, Datasheet URL=http://www.yageo.com/NewPortal/yageodocoutput?fileName=/pdf/R-Chip/PYu-RC_Group_51_RoHS_L_5.pdf, Datasheet Version="Rev. 5, 10/2016", Depth=0.8mm, Height=0.45mm, Lead Free=LeadFree, Length=1.6mm, Manufacturer URL=http://www.yageo.com/, Military Standard=Not, Number of Pins=2, Package Reference=0603, Packaging=TapeandReel, Radiation Hardening=No, REACH SVHC=NoSVHC, RoHSCompliant=true, Termination=SMD/SMT, Voltage Rating (DC)=50V, Width=0.8mm
R8 R10 R11 R13 R15 R16 R17 R43 R45 R46 R47 R48 R49 R50 R51 R52: library part CMP-00148-2, "Res Thick Film 0603 33 Ohm 5% 0.1W(1/10W) ±200ppm/C Pad SMD Automotive T/R", Package=0603, Power Rating=100mW, Resistance=33, Tolerance=5%
R22 R23 R24 R25 R28 R33 R34 R35 R37 R38: library part CMP-1012-00623-3, "Chip Resistor, 10 KOhm, +/- 1%, 0.1 W, -55 to 155 degC, 0603 (1608 Metric), RoHS, Tape and Reel", Case Code (Imperial)=0603, Case Code (Metric)=1608, Manufacturer=Panasonic, Max Operating Temperature=155degC, Max Power Dissipation=100mW, Min Operating Temperature=-55degC, Package Description="2-Pin Surface Mount Device, Body 1.6 x 0.85 mm", Package Quantity=1, Package Reference=603, Resistance=10k, Temperature Coefficient=100ppm\/degreesC, Tolerance=1%, Voltage Rating=75V, Case\/Package=0603, Composition=ThickFilm, Contact Plating=Tin, Datasheet URL=https://industrial.panasonic.com/cdbs/www-data/pdf/RDA0000/AOA0000C304.pdf, Datasheet Version=02/2017, Depth=0.8mm, Height=0.45mm, Lead Free=LeadFree, Length=1.6mm, Manufacturer URL=http://www.panasonic.com/, Military Standard=Not, Mount=SurfaceMount, Mounting Technology=SurfaceMount, Number of Pins=2, Number of Terminations=2, Packaging=TapeandReel, Power Rating=100mW, Radiation Hardening=No, REACH SVHC=NoSVHC, RoHSCompliant=true, Termination=SMD/SMT, Voltage Rating (DC)=75V, Width=0.031inch
R27: library part CMP-2000-00551-1, Manufacturer=Panasonic, Part Number=ERJ-3EKF5232V
R29: library part CMP-2000-00182-1, Manufacturer=Panasonic, Part Number=ERJ-3EKF1003V
R30 R31: library part CMP-2001-01354-1, Manufacturer=Yageo, Part Number=RC0805JR-07200RL
R44: library part CMP-2001-01105-1, Manufacturer=Yageo, Part Number=RC0805FR-07374RL
TP1 TP2 TP3 TP4 TP5 TP6 TP7 TP8 TP9 TP10 TP11 TP12: library part CMP-00017-2
U1: library part CMP-00040-2, "Teensy 4.1 w/ Headers"
U2: "Integrated Circuit", Manufacturer_Name="Texas Instruments", Mouser Part Number=595-TPS2116DRLR, Arrow Part Number=TPS2116DRLR, Arrow Price/Stock=https://www.arrow.com/en/products/tps2116drlr/texas-instruments?region=nac, Datasheet Link=https://www.ti.com/lit/gpn/tps2116, Height=0.6mm, Manufacturer_Part_Number=TPS2116DRLR, Mouser Price/Stock=https://www.mouser.co.uk/ProductDetail/Texas-Instruments/TPS2116DRLR?qs=aP1CjGhiNiGo3XAyXcVPaQ%3D%3D
U3: library part CMP-04918-000657-1, "IC REG BOOST ADJ 3A SOT563"
U4: library part CMP-0133-00207-2, "IC LI-ION/LI-POLY CTRLR 10MSOP", Battery Pack Voltage=4.2V, Case/Package=MSOP, Max Charge Current=1.1A, Max Operating Temperature=85°C, Max Supply Voltage=6V, Min Operating Temperature=-40°C, Min Supply Voltage=3.75V, Output Current=1.2A, Output Voltage=4.5V, Package Quantity=2500, Fault Protection="Over Temperature", Lead Free="Lead Free", Mount="Surface Mount", Number of Cells=1, Number of Pins=10, Packaging="Tape and Reel", Radiation Hardening=No
U5: library part CMP-207130-000026-1, "GNSS LCC RX, ROM, TCXO, LNA, SAW"

## Nets (pads, with @x,y where several pads share a name; then routed paths per layer and width w, separated by ;. In a path a pad name is that pad's centre, name@x,y a point inside that pad or via, vN(x,y) a via of type N, cw(c..) or ccw(c..) an arc to the next point about the centre after c; other vN are vias at no path point)
3.3V: C9.1 C10.1 R1.2 R2.2 R3.2 R4.2 R5.2 R6.2 R7.1 R19.1 R21.1 R25.2 U1.15 U1.46 U5.7 U5.8
3Vo: R9.1
5V: C1.2 R26.1 R53.1 TP5.1 U1.48
BT: R8.2
CHARGE_PG: R35.2 U1.20 U4.7
CHARGE_PROG: R38.2 TP8.1 U4.6
CHARGE_STAT1: R33.2 U1.18 U4.3
CHARGE_STAT2: R34.2 U1.19 U4.4
CS: R17.2
CS0: U1.12
CTS: R47.2
DI: R15.2
FB: R27.1 R29.2 TP4.1 U3.1
GND: BT1.2 C1.1 C2.2 C3.2 C4.2 C5.2 C6.1 C7.1 C8.2 C9.2 C10.2 C11.2 J1.3 J3.2 J4.2 J5.2 J6.2 J6.3 J6.4 J6.5 J7.10 J7.MP1 J7.MP2 J8.10 MP1.1 MP2.1 MP3.1 MP4.1 R18.1 R20.1 R23.2 R28.2 R29.1 R30.1 R31.1 R36.2 R37.1 R38.1 R44.2 U1.1 U1.34 U1.47 U2.1 U3.4 U4.5 U5.1 U5.10 U5.12
GNSS_EXTINT: R43.2 TP10.1 U1.6
GNSS_RST: R45.1 TP11.1 U1.7
IMU_INT: R16.2 U1.5
IMU_RST: R13.2 U1.4
MISO0: U1.14
MOSI0: U1.13
NetAv: R49.2 U1.21
NetBT1_1: BT1.1 C11.1 U5.6
NetDS1_2: DS1.2 R30.2
NetDS2_2: DS2.2 R31.2
NetDS3_2: DS3.2 R44.1
NetJ1_1: J1.1 R7.2
NetJ1_2: J1.2 R9.2
NetJ1_4: J1.4 R12.2
NetJ1_5: J1.5 R14.2
NetJ1_6: J1.6 R16.1
NetJ2_1: J2.1 R8.1
NetJ2_2: J2.2 R10.1
NetJ2_3: J2.3 R11.1
NetJ2_4: J2.4 R13.1
NetJ2_5: J2.5 R15.1
NetJ2_6: J2.6 R17.1
NetR24_1: R24.1 R28.1 U2.4
NetR32_1: R32.1 R36.1 R37.2
NetR39_2: R39.2 U5.17
NetR40_2: R40.2 U5.16
NetR41_2: R41.2 U5.3
NetR42_2: R42.2 U5.2
NetR43_1: R43.1 U5.5
NetR45_2: R45.2 U5.9
OnOff: R52.2 U1.23
P0: R10.2 R18.2 R19.2
P1: R11.2 R20.2 R21.2
PPS: TP9.1 U5.4
PWR_SEL: C4.1 C5.1 L1.1 R22.1 TP6.1 U2.2 U2.7 U3.2 U3.3
PWR_SRC: R25.1 TP7.1 U1.8 U2.8
RB_1: J7.1 J8.1 R46.1
RB_2: J7.2 J8.2 R47.1
RB_3: J7.3 J8.3 R48.1
RB_4: J7.4 J8.4 R49.1
RB_5: J7.5 J8.5 R50.1
RB_6: J7.6 J8.6 R51.1
RB_7: J7.7 J8.7 R52.1
RB_8: J7.8 J8.8 R53.2
RB_9: J7.9 J8.9
RF_IN: J6.1 U5.11
RI: R50.2 U1.22
RTS: R48.2
RX1: R42.1 U1.2
RX2: R46.2 U1.9
SCK: U1.35
SCL0: R1.1 R12.1 R39.1 U1.41
SCL1: R3.1 U1.38
SCL2: R5.1 U1.16
SDA0: R2.1 R14.1 R40.1 U1.40
SDA1: R4.1 U1.39
SDA2: R6.1 U1.17
SOC: R22.2 R23.1 U1.45
SW: L1.2 U3.5
TEENSY_A0: U1.36
TEENSY_A1: U1.37
TEENSY_A6: U1.42
TEENSY_A7: U1.43
TEENSY_A14: U1.30
TEENSY_A15: U1.31
TEENSY_A16: U1.32
TEENSY_A17: U1.33
TEENSY_D9: U1.11
TEENSY_D22: U1.44
TEENSY_D32: U1.24
TEENSY_D33: U1.25
TEENSY_D34: U1.26
TEENSY_D35: U1.27
TEENSY_D36: U1.28
TEENSY_D37: U1.29
THERM: R32.2 TP12.1 U4.8
TX1: R41.1 U1.3
TX2: R51.2 U1.10
V_OUT: C6.2 C7.2 R26.2 R27.2 TP3.1 U3.6
VBAT: C2.1 C8.1 J3.1 TP1.1 U2.6 U4.9 U4.10
VBUS: C3.1 J4.1 J5.1 R24.2 R33.1 R34.1 R35.1 TP2.1 U2.3 U2.5 U4.1 U4.2
pads on no net: DS1.1 DS2.1 DS3.1 FID1.1 FID2.1 FID3.1 FID4.1 SB1.1 SB1.2 SB2.1 SB2.2 SB3.1 SB3.2 U5.13 U5.14 U5.15 U5.18

## Polygon pours and split planes (outlines as drawn)
GND on Top Signal "GND_L01_P001" (solid, shelved, pour order 1): 1200,1000 cw(c1200,1200) 1000,1200 cw(c1200,1200) 1200,1400 ccw(c1200,1600) 1400,1600 1400,4400 ccw(c1200,4400) 1200,4600 cw(c1200,4800) 1000,4800 cw(c1200,4800) 1200,5000 3400,5000 cw(c3400,4800) 3600,4800 cw(c3400,4800) 3400,4600 ccw(c3400,4400) 3200,4400 3200,1600 ccw(c3400,1600) 3400,1400 cw(c3400,1200) 3600,1200 cw(c3400,1200) 3400,1000
GND on Ground "GND_L02_P002" (solid, shelved, pour order 2): 1200,1000 cw(c1200,1200) 1000,1200 cw(c1200,1200) 1200,1400 ccw(c1200,1600) 1400,1600 1400,4400 ccw(c1200,4400) 1200,4600 cw(c1200,4800) 1000,4800 cw(c1200,4800) 1200,5000 3400,5000 cw(c3400,4800) 3600,4800 cw(c3400,4800) 3400,4600 ccw(c3400,4400) 3200,4400 3200,1600 ccw(c3400,1600) 3400,1400 cw(c3400,1200) 3600,1200 cw(c3400,1200) 3400,1000
GND on Power "GND_L03_P0003" (solid, shelved, pour order 3): 1200,1000 cw(c1200,1200) 1000,1200 cw(c1200,1200) 1200,1400 ccw(c1200,1600) 1400,1600 1400,4400 ccw(c1200,4400) 1200,4600 cw(c1200,4800) 1000,4800 cw(c1200,4800) 1200,5000 3400,5000 cw(c3400,4800) 3600,4800 cw(c3400,4800) 3400,4600 ccw(c3400,4400) 3200,4400 3200,1600 ccw(c3400,1600) 3400,1400 cw(c3400,1200) 3600,1200 cw(c3400,1200) 3400,1000
GND on Bottom Signal "GND_L04_P004" (solid, shelved, pour order 4): 1200,1000 cw(c1200,1200) 1000,1200 cw(c1200,1200) 1200,1400 ccw(c1200,1600) 1400,1600 1400,4400 ccw(c1200,4400) 1200,4600 cw(c1200,4800) 1000,4800 cw(c1200,4800) 1200,5000 3400,5000 cw(c3400,4800) 3600,4800 cw(c3400,4800) 3400,4600 ccw(c3400,4400) 3200,4400 3200,1600 ccw(c3400,1600) 3400,1400 cw(c3400,1200) 3600,1200 cw(c3400,1200) 3400,1000

## Silkscreen, mask and mechanical layers (free items; w line width, h text height)
Top Overlay:
  drawing of 13 lines, arcs and shapes, not listed
  text "Teensy" at 1810,3679.99 h60
  text "VBAT" at 1610,1410 h50
  text "VBUS" at 2760,1410 h50
Board Outline:
  the board outline again, w10
Drill Drawing:
  lines w10: 1000,690 1000,710 ; 1000,1200 1000,700 ; 1060,680 1000,700 ; 1060,720 1000,700 ; 1200,890 1200,910 ; 1200,1200 1200,900 ; 1260,880 1200,900 ; 1260,920 1200,900 ; 2019.09,700 1000,700 ; 2019.09,900 1200,900 ; 2580.91,700 3600,700 ; 2580.91,900 3400,900 ; 3340,880 3400,900 ; 3340,920 3400,900 ; 3400,890 3400,910 ; 3400,1000 3900,1000 ; 3400,4800 3700,4800 ; 3400,5000 3900,5000 ; 3540,680 3600,700 ; 3540,720 3600,700 ; 3600,690 3600,710 ; 3600,1200 3600,700 ; 3680,1260 3700,1200 ; 3680,4740 3700,4800 ; 3690,1200 3710,1200 ; 3690,4800 3710,4800 ; 3700,2719.09 3700,1200 ; 3700,3280.91 3700,4800 ; 3720,1260 3700,1200 ; 3720,4740 3700,4800 ; 3880,1060 3900,1000 ; 3880,4940 3900,5000 ; 3890,1000 3910,1000 ; 3890,5000 3910,5000 ; 3900,2719.09 3900,1000 ; 3900,3280.91 3900,5000 ; 3920,1060 3900,1000 ; 3920,4940 3900,5000 ; 3400,900 3400,1200 3700,1200
  text "3600 (mil)" at 3735.99,2729.09 h60 r90
  text "4000 (mil)" at 3935.99,2729.09 h60 r90
  text "2200 (mil)" at 2029.09,864.01 h60
  text "2600 (mil)" at 2029.09,664.01 h60